# EAGLE board Pro-Edge_PCB_608BD520 (EAGLE 7.5.0)
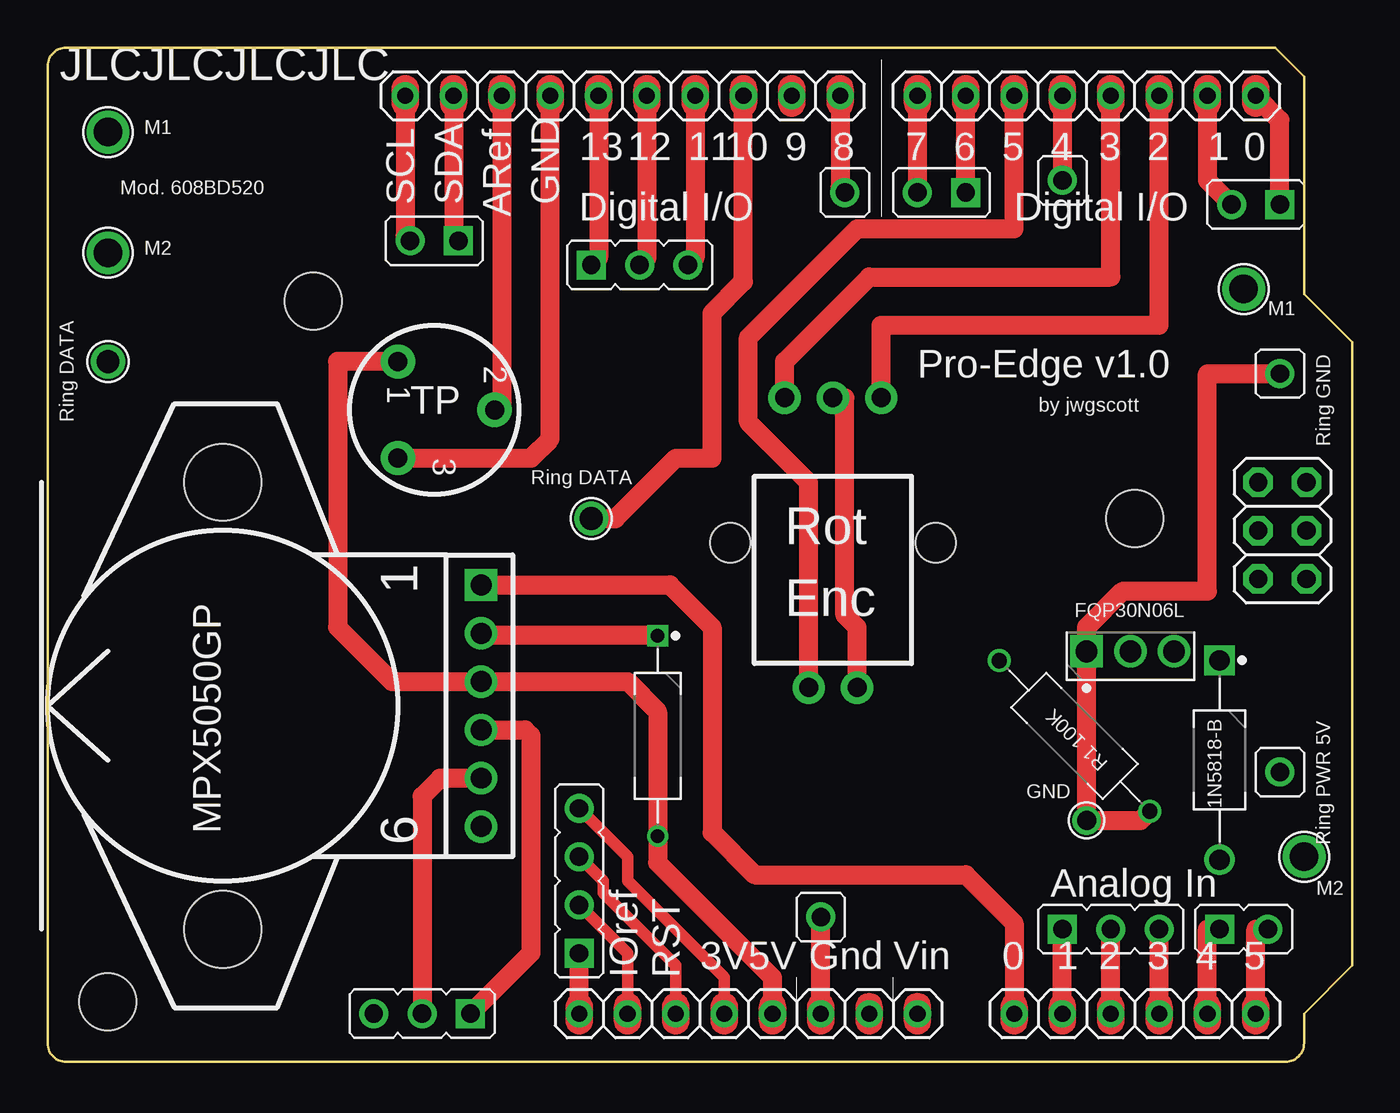
[diagram p0: board, top side]
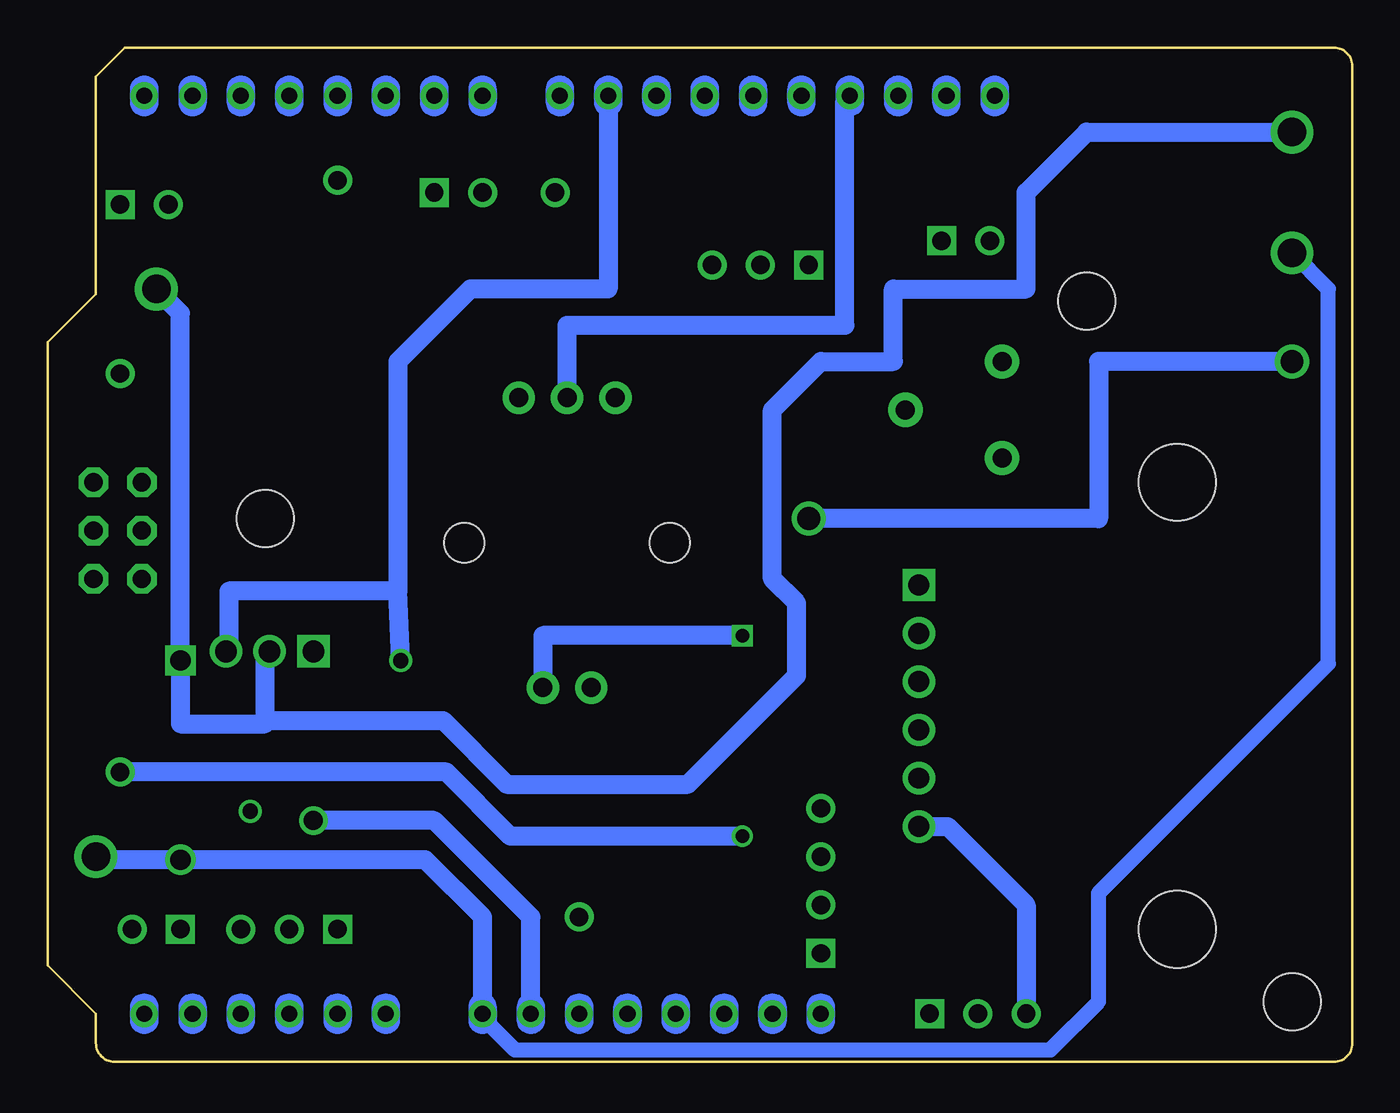
[diagram p1: board, bottom side, seen from below]

Size 68.58 x 53.34 mm. Coordinates in mm from the lower left corner, seen from the top.
Outline: 0,52.34 0.01,52.45 0.02,52.56 0.06,52.67 0.1,52.77 0.15,52.87 0.22,52.96 0.29,53.05 0.38,53.12 0.47,53.19 0.57,53.24 0.67,53.28 0.78,53.31 0.89,53.33 1,53.34 64.52,53.34 66.04,51.82 66.04,40.39 68.58,37.85 68.58,5.08 66.04,2.54 66.04,1 66.03,0.89 66.02,0.78 65.98,0.67 65.94,0.57 65.89,0.47 65.82,0.38 65.75,0.29 65.66,0.22 65.57,0.15 65.47,0.1 65.37,0.06 65.26,0.02 65.15,0.01 65.04,0 1,0 0.89,0.01 0.78,0.02 0.67,0.06 0.57,0.1 0.47,0.15 0.38,0.22 0.29,0.29 0.22,0.38 0.15,0.47 0.1,0.57 0.06,0.67 0.02,0.78 0.01,0.89 0,1 0,52.34
Copper layers (1*16): Top 0.035mm / dielectric 1.5mm / Bottom 0.035mm
Design rules "default *": minimum track width 10mil, minimum drill 0.61mm, track to track 8mil, track to pad 8mil, pad to pad 8mil, via to via 8mil, smd to smd 8mil, copper to edge 40mil, drill to drill 8mil, minimum pad ring 0mil, minimum via ring 8mil, stop-mask expansion 2mil, vias tented up to drill 31mil, thermal gap 10mil
Net classes: 0 Default: width 0.4 mm, clearance 0.254 mm, clearance 0.254 mm to class 1; 1 usbvcc: width 0.508 mm, clearance 0.254 mm, clearance 0.254 mm to class 0
Holes 3 mm at 13.97,40.01 57.15,28.57 3.17,3.17

## Footprints (pad centres in the part's own frame; a part is rotated, then mirrored left to right if it is on the bottom)
1X06 = drill 0.85 pad 1.422: 1 -6.35,0; 2 -3.81,0; 3 -1.27,0; 4 1.27,0; 5 3.81,0; 6 6.35,0
CAPPAD1054W51L660D241 = drill 0.71 pad 1.11 square: 1 -5.27,0 | drill 0.71 pad 1.11: 2 5.27,0
DIOAD1048W78L520D270_AD2 = drill 1.06 pad 1.59 square: 1 -5.24,0 | drill 1.06 pad 1.59: 2 5.24,0
2X03 = drill 0.95 pad 1.55 octagon: 1 -2.54,-1.27; 2 -2.54,1.27; 3 0,-1.27; 4 0,1.27; 5 2.54,-1.27; 6 2.54,1.27
1X10 = drill 0.85 pad 1.422: 1 -11.43,0; 2 -8.89,0; 3 -6.35,0; 4 -3.81,0; 5 -1.27,0; 6 1.27,0; 7 3.81,0; 8 6.35,0; 9 8.89,0; 10 11.43,0
1X08 = drill 0.85 pad 1.422: 1 -8.89,0; 2 -6.35,0; 3 -3.81,0; 4 -1.27,0; 5 1.27,0; 6 3.81,0; 7 6.35,0; 8 8.89,0
JMP1 = drill 0.965 pad 1.524: 1 0,0
JMP1Q = drill 0.965 pad 1.524 square: 1 0,-1.27 | drill 0.965 pad 1.524: 2 0,1.27
JMP3 = drill 0.965 pad 1.524 square: 1 -2.54,0 | drill 0.965 pad 1.524: 2 0,0; 3 2.54,0
JMP4 = drill 0.965 pad 1.524 square: 1 -3.81,0 | drill 0.965 pad 1.524: 2 -1.27,0; 3 1.27,0; 4 3.81,0
JMP2 = drill 0.965 pad 1.524 square: 1 -1.27,0 | drill 0.965 pad 1.524: 2 1.27,0
TO230P670X250X920-3 = drill 1.14 pad 1.71 square: 1 0,0 | drill 1.14 pad 1.71: 2 2.3,0; 3 4.6,0
RESAD1120W55L680D260_AD1 = drill 0.8 pad 1.2: 1 -5.6,0; 2 5.6,0
NXP_Semiconductor-SOT1852-1-03_2016-J-MFG = drill 1.1 pad 1.7 square: 1 6.35,-1.197 | drill 1.1 pad 1.7: 2 -3.81,-1.197; 3 -1.27,-1.197; 4 1.27,-1.197; 5 3.81,-1.197; 6 -6.35,-1.197 | hole 4.05: -11.747,12.382; 11.748,12.382
RotaryEncoder1 = drill 1 pad 1.7: 1 -2.54,7.62; 2 0,7.62; 3 2.54,7.62; 4 -1.27,-7.62; 5 1.27,-7.62 | hole 2.1: 5.398,0; -5.398,0
TrimPoti10K = drill 1 pad 1.8: 1 -1.27,2.54; 2 3.81,0; 3 -1.27,-2.54
AWG20 = drill 1 pad 1.5: WIRE 0,0
AWG18 = drill 1.2 pad 1.8: WIRE 0,0
AWG16 = drill 1.5 pad 2.25: WIRE 0,0

## Placement (x,y rotation side)
AD  6x1F-H8.5  [1X06]  57.15,2.54 0 top
C1  CAPPAD1054W51L660D241  [CAPPAD1054W51L660D241]  32.07,17.14 270 top
D1  1N5818G  [DIOAD1048W78L520D270_AD2]  61.6,15.88 270 top
ICSP  3x2 M  [2X03]  64.9,27.94 270 top
IOH  10x1F-H8.5  [1X10]  30.23,50.8 180 top
IOL  8x1F-H8.5  [1X08]  54.61,50.8 180 top
J1  JMP1  [JMP1]  64.77,15.24 0 top
J2  JMP1  [JMP1]  64.77,36.2 0 top
J3  JMP1Q  [JMP1Q]  46.99,45.72 90 top
J4  JMP1Q  [JMP1Q]  63.5,45.09 90 top
J5  JMP3  [JMP3]  31.12,41.91 0 top
J6  JMP1Q  [JMP1Q]  20.32,43.18 90 top
J7  JMP1  [JMP1]  41.91,45.72 0 top
J8  JMP1  [JMP1]  53.34,46.35 0 top
J9  JMP1  [JMP1]  40.64,7.62 0 top
J10  JMP4  [JMP4]  27.94,9.53 90 top
J11  JMP3  [JMP3]  55.88,6.99 0 top
J12  JMP2  [JMP2]  62.87,6.99 0 top
J13  JMP3  [JMP3]  19.69,2.54 180 top
POWER  8x1F-H8.5  [1X08]  36.83,2.54 0 top
Q1  1W, 23W  [TO230P670X250X920-3]  54.61,21.59 0 top
R1  CFR50SJT-52-11K  [RESAD1120W55L680D260_AD1]  53.98,17.14 315 top
U1  NXP_SEMICONDUCTOR-SOT1852-1-03_2016-J-MFG  [NXP_Semiconductor-SOT1852-1-03_2016-J-MFG]  21.59,18.73 90 top
U2  ROTARYENCODER1  [RotaryEncoder1]  41.27,27.3 0 top
U3  TRIMPOTI10K  [TrimPoti10K]  19.69,34.29 0 top
WIRE1  AWG20  [AWG20]  54.61,12.7 0 top
WIRE2  AWG18  [AWG18]  3.17,36.83 0 top
WIRE3  AWG18  [AWG18]  28.57,28.57 0 top
WIRE4  AWG16  [AWG16]  3.17,42.55 0 top
WIRE5  AWG16  [AWG16]  3.17,48.89 0 top
WIRE6  AWG16  [AWG16]  62.87,40.64 0 top
WIRE7  AWG16  [AWG16]  66.04,10.8 0 top

## Library data of the parts
AD ICSP IOH IOL J1-J13 POWER U1-U3 WIRE1-WIRE7 = common
C1 = common; DATASHEET: http://datasheets.diptrace.com/vishay/173D.pdf; MANUFACTURER: Vishay
D1 = common; DATASHEET: http://datasheets.diptrace.com/on_semi/1n5817-d.pdf; MANUFACTURER: ON Semiconductor; PART_NUMBER_(DIGI-KEY): 1N5818GOS-ND; UNIQUE_NAME: ONSEMI_59-10_DIO
Q1 = common; DATASHEET: http://datasheets.diptrace.com/renesas/2sj598.pdf; MANUFACTURER: Renesas Electronics; UNIQUE_NAME: RENESAS_PRSS0004ZM-A
R1 = common; DATASHEET: http://datasheets.diptrace.com/yageo/cfr.pdf; MANUFACTURER: Yageo; PART_NUMBER_(DIGI-KEY): CFR50SJT-52-11K-ND; UNIQUE_NAME: YAGEO_CFR50S

## Nets
Net_0: C1.2 J1.1 POWER.5 U1.4 U3.1
Net_1: C1.1 IOH.7 U1.5 U2.2 U2.5 U3.3
Net_2: AD.1 U1.1
Net_3: IOL.3 U2.3
Net_4: IOL.4 U2.1
Net_5: IOL.6 U2.4
Net_6: D1.2 POWER.8 WIRE4.WIRE WIRE7.WIRE
Net_7: D1.1 Q1.2 WIRE5.WIRE WIRE6.WIRE
Net_8: IOH.2 Q1.3 R1.1
Net_9: J2.1 POWER.7 Q1.1 R1.2 WIRE1.WIRE
Net_10: IOH.8 U3.2
Net_11: IOH.3 WIRE2.WIRE WIRE3.WIRE
Net_12: IOL.1 J4.1
Net_13: IOL.2 J4.2
Net_14: IOL.7 J3.1
Net_15: IOL.8 J3.2
Net_16: IOH.4 J5.3
Net_17: IOH.5 J5.2
Net_18: IOH.6 J5.1
Net_19: IOH.9 J6.1
Net_20: IOH.10 J6.2
Net_21: IOH.1 J7.1
Net_22: IOL.5 J8.1
Net_23: J10.1 POWER.1
Net_24: J10.2 POWER.2
Net_25: J10.3 POWER.3
Net_26: J10.4 POWER.4
Net_27: AD.2 J11.1
Net_28: AD.3 J11.2
Net_29: AD.4 J11.3
Net_30: AD.5 J12.1
Net_31: AD.6 J12.2
Net_32: J13.1 U1.3
Net_33: J13.2 U1.2
Net_34: J13.3 U1.6
Net_35: J9.1 POWER.6

## Tracks (layer width: path | path; a pad name or v marks a point on that pad's centre or on a via)
Net_0
  Top 1: POWER.5 38.1,4.45 32.07,10.48 C1.2 32.07,18.41 30.48,20 U1.4 18.1,20 15.24,22.86 15.24,36.83 U3.1
  Bottom 1: C1.2 44.26,11.88 47.62,15.24 J1.1
Net_1
  Top 1: C1.1 22.91,22.41 U1.5 | U2.5 42.55,22.86 41.91,23.49 41.91,34.92 U2.2 | U3.3 25.4,31.75 26.42,32.77 IOH.7
  Bottom 1: C1.1 42.55,22.41 U2.5 | U2.2 41.27,38.73 26.67,38.73 26.67,50.55 IOH.7
Net_2
  Top 1: U1.1 32.7,25.08 34.93,22.86 34.93,12.07 37.15,9.84 48.26,9.84 50.8,7.3 AD.1
Net_3
  Top 1: U2.3 43.81,38.73 58.42,38.73 IOL.3
Net_4
  Top 1: U2.1 38.73,36.83 43.18,41.27 55.88,41.27 IOL.4
Net_5
  Top 1: U2.4 40.01,30.48 36.83,33.66 36.83,38.1 42.55,43.81 50.8,43.81 IOL.6
Net_6
  Bottom 0.8: POWER.8 45.72,2.33 44.02,0.64 15.88,0.64 13.34,3.17 13.34,8.89 1.27,20.95 1.27,40.64 WIRE4.WIRE
  Bottom 1: POWER.8 45.72,7.62 48.73,10.64 D1.2 65.88,10.64 WIRE7.WIRE
Net_7
  Bottom 1: 57.15,17.95 57.15,17.78 61.6,17.78 D1.1 61.6,39.37 WIRE6.WIRE | 57.15,17.95 57.15,21.35 Q1.2 | 57.15,17.95 47.8,17.95 44.45,14.61 34.93,14.61 29.21,20.32 29.21,24.13 30.48,25.4 30.48,34.29 27.94,36.83 24.13,36.83 24.13,40.64 17.14,40.64 17.14,45.72 13.97,48.89 WIRE5.WIRE
Net_8
  Bottom 1: IOH.2 39.12,40.64 46.36,40.64 50.16,36.83 50.16,24.77 | 50.16,24.77 59.05,24.77 59.05,21.74 Q1.3 | R1.1 50.16,24.77
Net_9
  Top 1: J2.1 60.96,36.2 60.96,24.77 56.52,24.77 54.61,22.86 Q1.1 WIRE1.WIRE 57.45,12.7 R1.2
  Bottom 1: POWER.7 43.18,7.62 48.26,12.7 WIRE1.WIRE
Net_10
  Top 1: IOH.8 23.88,34.67 U3.2
Net_11
  Top 1: WIRE3.WIRE 29.84,28.57 33.02,31.75 34.93,31.75 34.93,39.37 36.58,41.02 IOH.3
  Bottom 1: WIRE2.WIRE 13.34,36.83 13.34,28.57 WIRE3.WIRE
Net_12
  Top 1: J4.1 64.77,49.53 IOL.1
Net_13
  Top 1: IOL.2 60.96,46.35 J4.2
Net_14
  Top 1: J3.1 IOL.7
Net_15
  Top 1: IOL.8 J3.2
Net_16
  Top 1: IOH.4 34.04,42.29 J5.3
Net_17
  Top 1: IOH.5 31.5,42.29 J5.2
Net_18
  Top 1: IOH.6 28.96,42.29 J5.1
Net_19
  Top 1: IOH.9 21.34,43.43 J6.1
Net_20
  Top 1: IOH.10 18.8,43.43 J6.2
Net_21
  Top 1: IOH.1 41.66,45.97 J7.1
Net_22
  Top 1: IOL.5 J8.1
Net_23
  Top 1: POWER.1 J10.1
Net_24
  Top 0.6: POWER.2 30.48,5.71 J10.2
Net_25
  Top 0.6: POWER.3 33.02,5.08 29.21,8.89 29.21,9.53 J10.3
Net_26
  Top 0.6: POWER.4 35.56,4.45 30.48,9.53 30.48,10.8 J10.4
Net_27
  Top 1: AD.2 J11.1 | J11.1
Net_28
  Top 1: AD.3 J11.2 | J11.2
Net_29
  Top 1: AD.4 J11.3 | J11.3
Net_30
  Top 1: AD.5 60.96,6.99 J12.1
Net_31
  Top 1: AD.6 63.5,6.99 J12.2
Net_32
  Top 1: U1.3 25.08,17.46 25.4,17.14 25.4,5.71 J13.1
Net_33
  Top 1: U1.2 20.64,14.92 19.69,13.97 J13.2
Net_34
  Bottom 1: U1.6 21.27,12.38 17.14,8.25 J13.3
Net_35
  Top 1: POWER.6 J9.1

## Text on the board
tPlace: JLCJLCJLCJLC | M1 | 13 | 12 | 11 | 10 | 9 | 8 | 7 | 6 | 5 | 4 | 3 | 2 | 1 | 0 | Mod. 608BD520 | SCL | SDA | GND | Digital I/O | Digital I/O | ARef | M2 | M1 | Pro-Edge v1.0 | by jwgscott | Ring DATA | Ring GND | Ring DATA | FQP30N06L | R1 100K | GND | 1N5818-B | Ring PWR 5V | Analog In | M2 | 3V | 5V | Gnd | Vin | 0 | 1 | 2 | 3 | 4 | 5 | IOref | RST